# Altium PCB DIY Air Quality Monitor.PcbDoc
Units mm, origin at the board's own origin, x right, y up, seen from the top; angles counter-clockwise.
Board outline 85 x 65 mm, 2 copper layers (Top Layer, Bottom Layer); 23 components, 23 nets, 111 pads, 4 vias.
Unrouted connection lines stored in the file: 1.
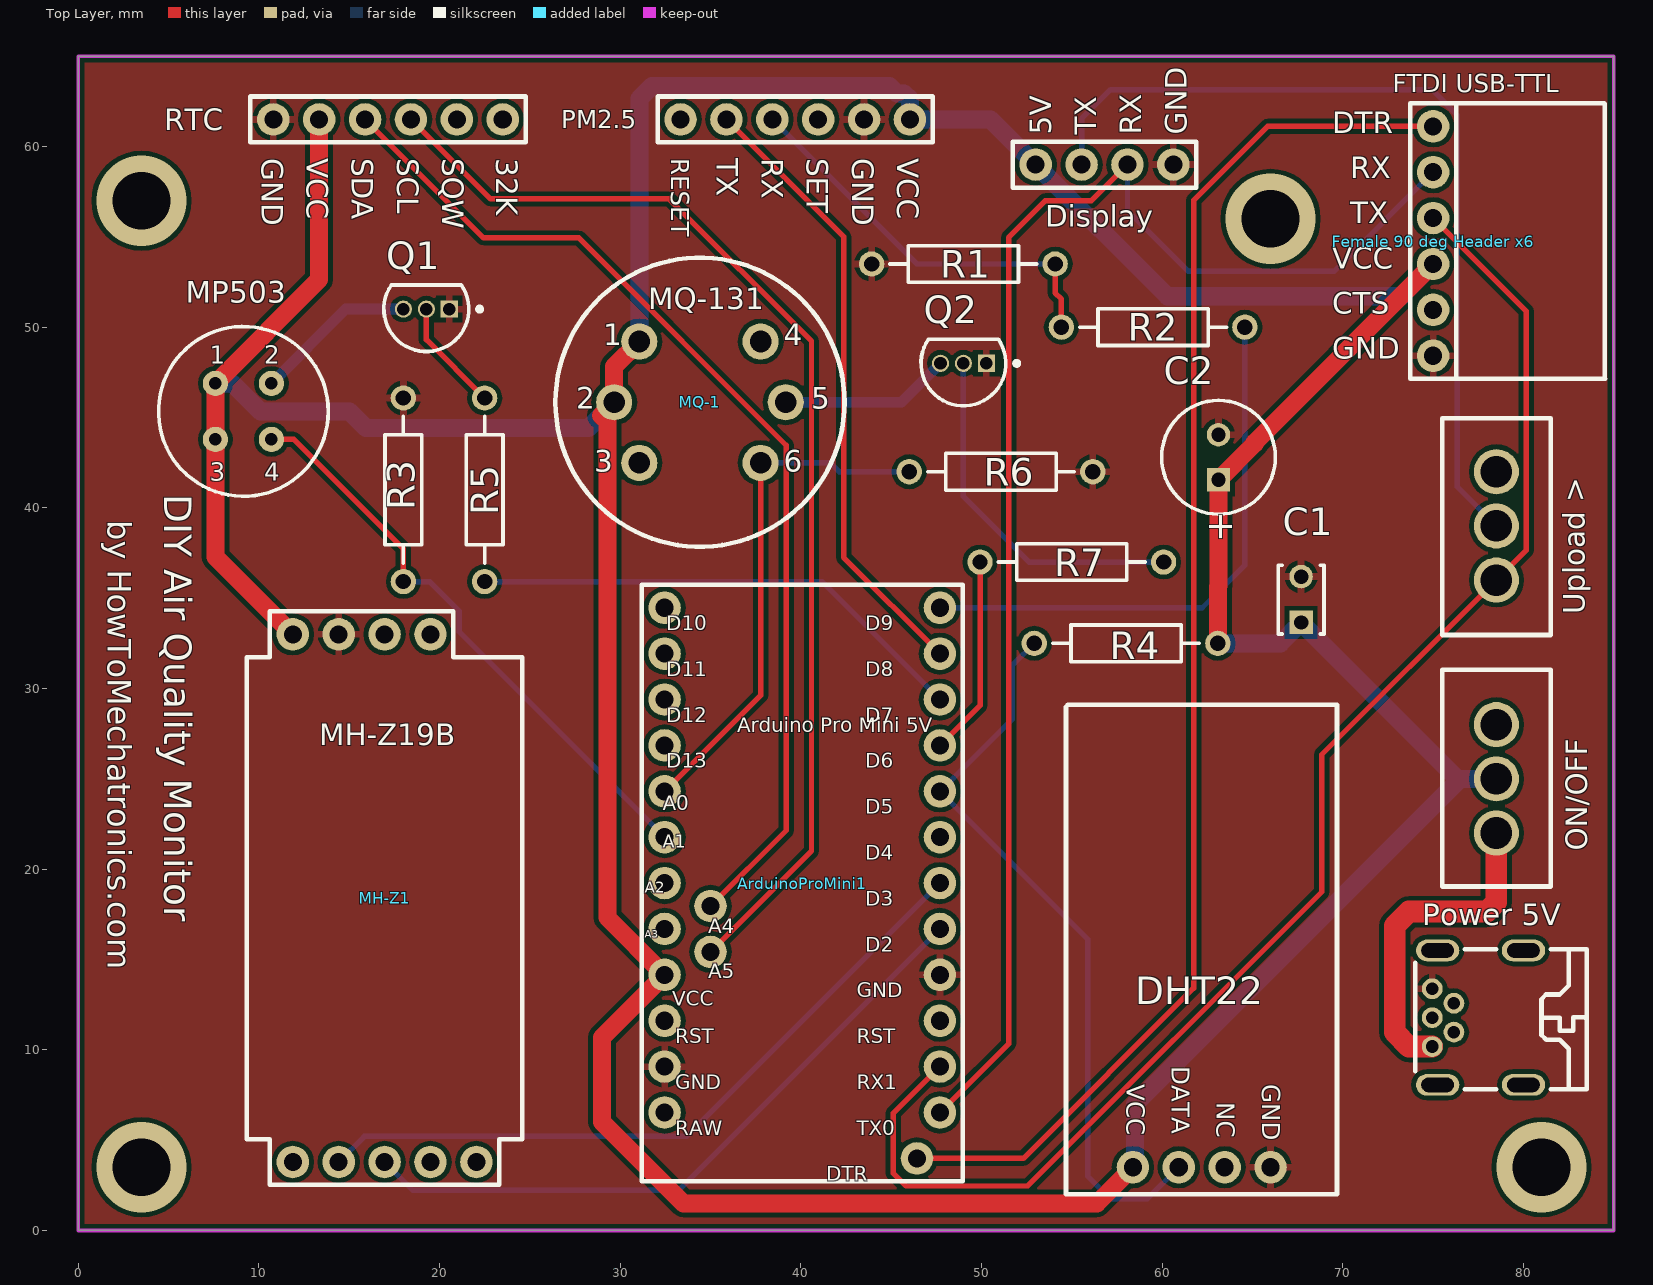
[diagram p0: Top Layer view]
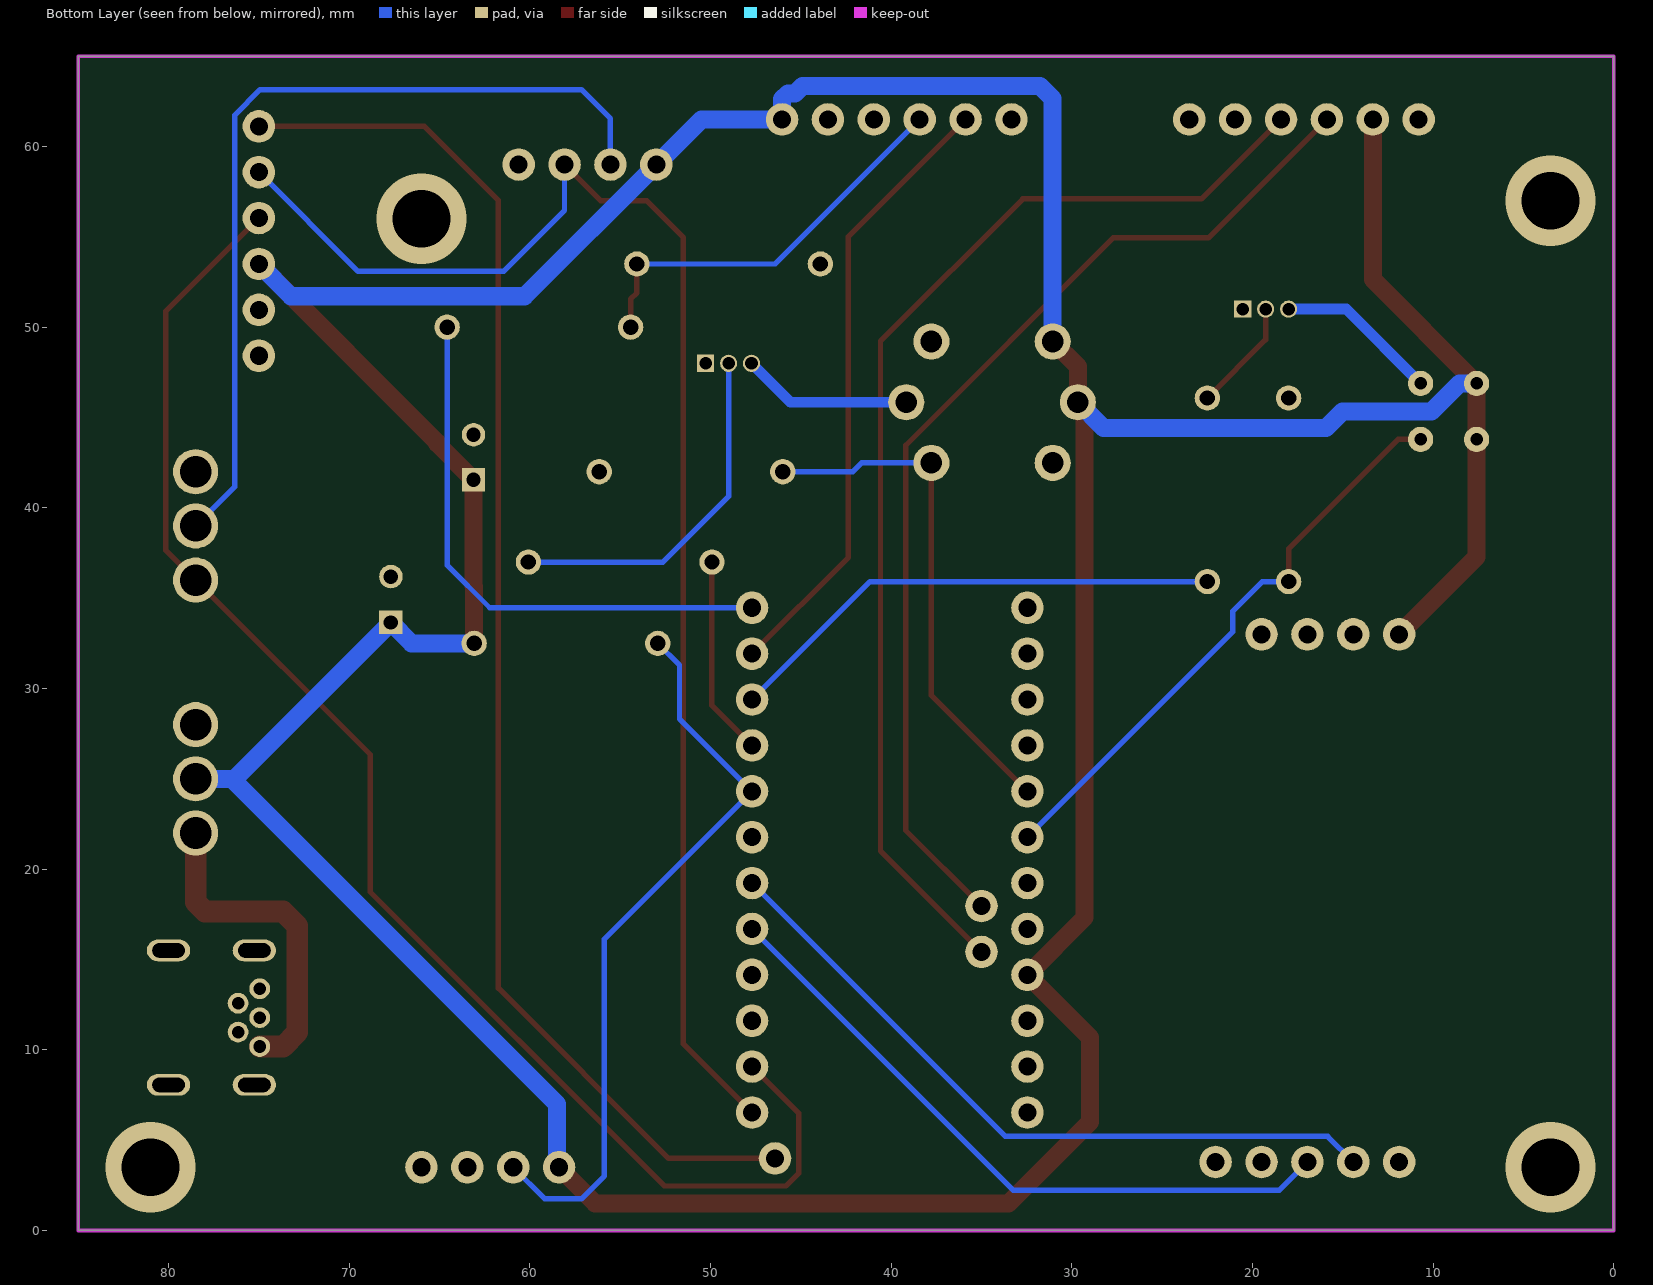
[diagram p1: Bottom Layer view, seen from below]
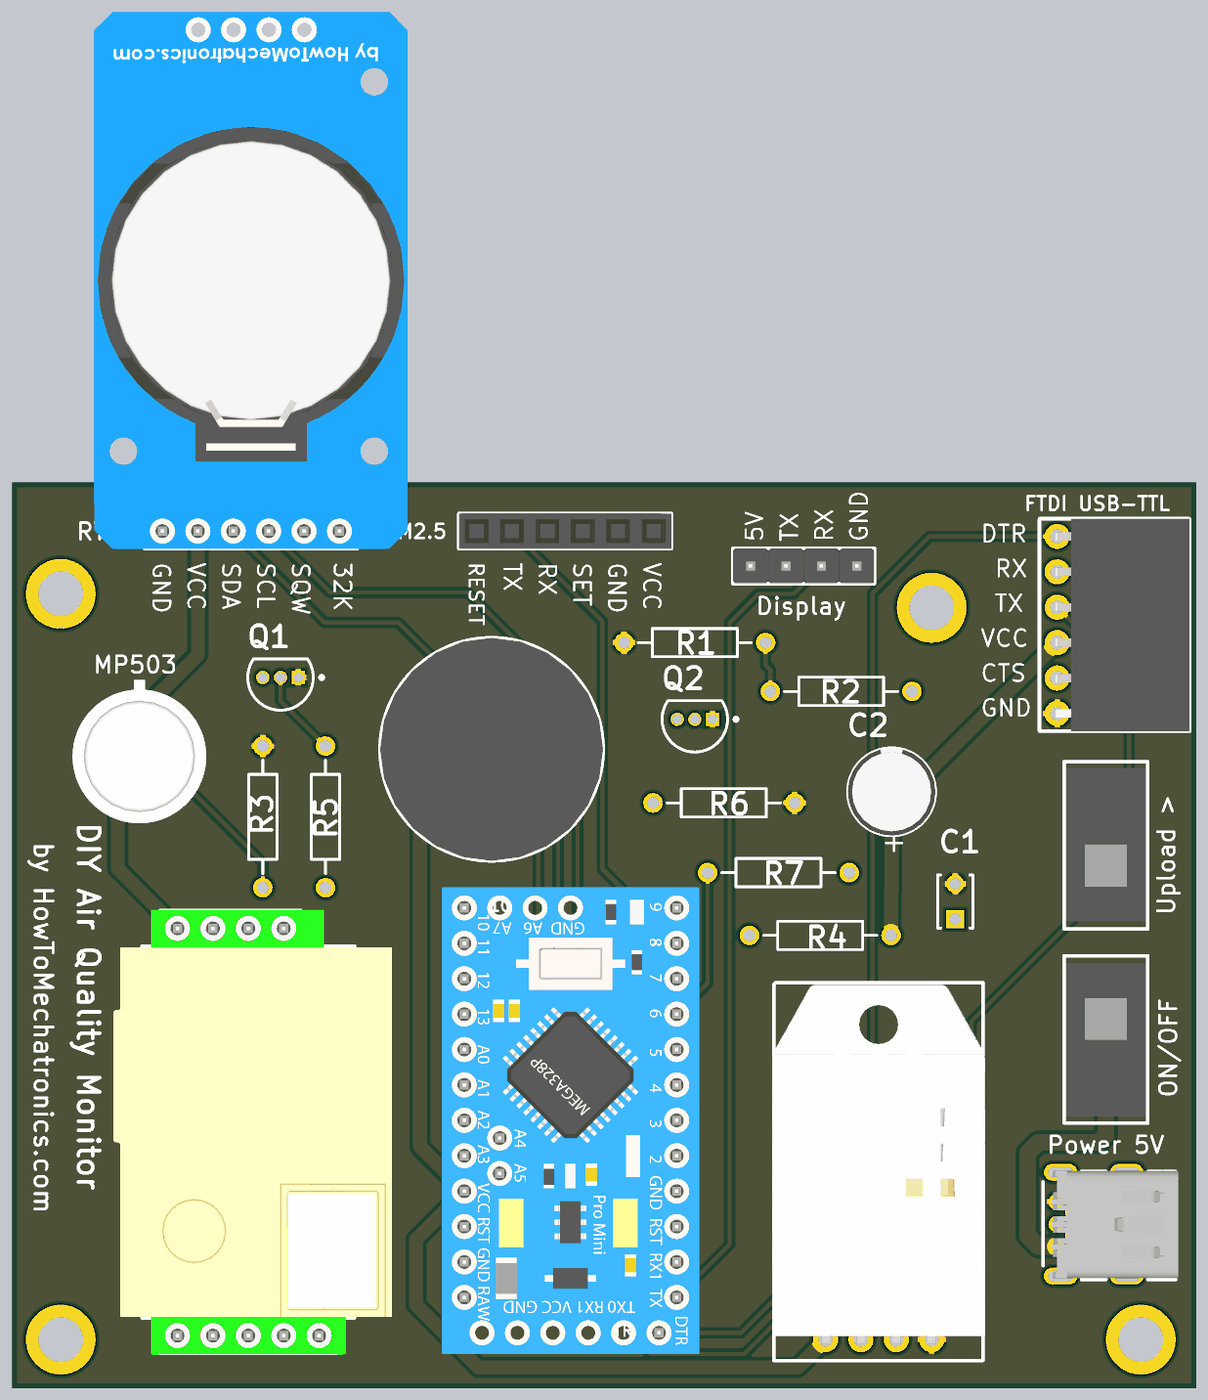
[diagram p2: 3D render of the assembled board from above, using the file's embedded part models]

## Layer stack, top to bottom
Top Solder: solder mask 0.0102, Solder Resist, Dk 3.5
Top Layer: signal copper 0.0356
Dielectric 1: dielectric 0.32, FR-4, Dk 4.8
Bottom Layer: signal copper 0.0356
Bottom Solder: solder mask 0.0102, Solder Resist, Dk 3.5

## Board outline
0,0 85,0 85,65 0,65

## Design rules (kind name [scope] priority, off if disabled: settings)
Clearance [All] p1: gap=0.254 ignorepadtopadclearanceinfootprint=FALSE except(0: Arc-Hole Track-Hole SMDPad-Hole THPad-Hole Via-Hole Fill-Hole Poly-Hole Region-Hole Text-Hole)
PolygonConnect [All] p1: connectstyle=Relief reliefconductorwidth=0.4 reliefentries=4 polygonreliefangle="90 Angle" airgapwidth=0.254
RoutingVias [All] p1: holewidth=0.711 width=1.27 viastyle="Through Hole" minholewidth=0.711 minwidth=1.27 maxholewidth=0.711 maxwidth=1.27
SolderMaskExpansion [All] p1: expansion=0.102 istentingtop=FALSE
Width Width_1 [InNet('+5')] p1: maxlimit=1 minlimit=0.3 preferedwidth=1
Width [All] p2: maxlimit=0.4 minlimit=0.3 preferedwidth=0.3
30 further rules are at their usual default settings.

## Components (designator, comment, footprint, x,y, rotation, side; value= is the part's Value field where it differs from the comment)
ArduinoProMini1 "5V Board" ARDUINO_PRO_MINI 32.46,34.47 r0 top
C1 "100pF" KEMT-C315-THT-2 67.691,34.925 r90 top
C2 "10uF" CAPPR55-250-1120X630X1220 63.119,42.799 r90 top
DHT22 "DHT22" DHT22 58.38,3.5 r0 top
Display "Pin Header x4 - Display" "Pin Header x4 - Display" 53,59 r90 top (schematic designator "Pin Header x4 - Display")
"Female 90 deg Header x6" "FTDI USB-TTL" "FEMALE 90 DEG HEADER X6" 75,54.77 r180 top
MH-Z1 "MH-Z19B CO2 Sensor" "MH-Z19B CO2 SENSOR" 11.88,3.79 r0 top
MP503 "MP503 VOC Sensor" "MP503 VOC SENSOR" 9.144,45.339 r0 top (schematic designator MP1)
MQ-1 "MQ-131 Ozone Sensor" "MQ-131 OZONE SENSOR" 34.417,45.847 r0 top
ON/OFF "Switch" Switch 78.5,25 r180 top (schematic designator Switch1)
PM2.5 "PMS5003 PM2.5 Sensor" "PMS5003 PM2.5 Sensor" 39.69,61.5 r270 top (schematic designator PMS1)
"Power 5V" "Mini USB TH" "MINI USB TH" 80,8.06 r90 top (schematic designator "Mini USB TH")
Q1 "2N3904" ONSC-TO-92-3-29-11 19.27,51 r180 top
Q2 "2N3904" ONSC-TO-92-3-29-11 49,48 r180 top
R1 "Res2" AXIAL-0.4 49,53.5 r0 top value=1K
R2 "Res2" AXIAL-0.4 59.5,50 r0 top value=1K
R3 "Res2" AXIAL-0.4 18,41 r90 top value=1K
R4 "Res2" AXIAL-0.4 58,32.5 r0 top value=1K
R5 "Res2" AXIAL-0.4 22.5,41 r90 top value=1K
R6 "Res2" AXIAL-0.4 51.08,42 r0 top value=1K
R7 "Res2" AXIAL-0.4 55,37 r0 top value=1K
RTC "DS3231 RTC" "DS3231 RTC" 10.8,61.5 r270 top (schematic designator DS1)
"Upload >" "Switch" Switch 78.5,39 r0 top (schematic designator Switch2)

## Footprints (in the part's own frame and the unit in brackets; to place one, negate y for a bottom-side part, rotate by r counter-clockwise, add the part's x,y. Pads: shape width x height; smd on the part's side, far side on the other; paste and mask are expansions set on the pad)
ARDUINO_PRO_MINI [mm] "5V Board"
  round 1.8 hole 1: A0(0,-10.16) A1(0,-12.7) A2(0,-15.24) A3(0,-17.78) A4/SDA(2.54,-16.51) A5/SCL(2.54,-19.05) D2(15.24,-17.78) D3(15.24,-15.24) D4(15.24,-12.7) D5(15.24,-10.16) D6(15.24,-7.62) D7(15.24,-5.08) D8(15.24,-2.54) D9(15.24,0) D10(0,0) D11(0,-2.54) D12(0,-5.08) D13(0,-7.62) DTR(13.97,-30.48) GND(0,-25.4) GND(15.24,-20.32) RAW(0,-27.94) RST(0,-22.86) RST(15.24,-22.86) RX1(15.24,-25.4) TX0(15.24,-27.94) VCC(0,-20.32)
  silkscreen extent -1.27,-31.75 16.51,1.27, body extent -1.63,-32 16.87,1.5, height 6.61
AXIAL-0.4 [mm] "Axial Device, Thru-Hole; 2 Leads; 0.4 in Pin Spacing"
  round 1.4 hole 0.85: 1(-5.08,0) 2(5.08,0)
  silkscreen extent -4.06,-1.02 4.06,1.02
CAPPR55-250-1120X630X1220 [mm] "THD, 2-Leads, Dia 6.3mm, Body Length 11.2mm"
  rect 1.3x1.3 hole 0.8: 1(-1.25,0)
  round 1.3 hole 0.8: 2(1.25,0)
  silkscreen extent -3.15,-3.15 3.15,3.15, body extent -3.15,-3.15 3.16,3.15, height 12.21
DHT22 [mm]
  round 1.8 hole 1: DATA(2.54,0) GND(7.62,0) NC(5.08,0) VCC(0,0)
  silkscreen extent -3.7,-1.5 11.3,25.6, body extent -3.84,-0.3 11.46,25.45, height 7.8
"DS3231 RTC" [mm] "DS3231 RTC"
  round 1.8 hole 1: 32K(0,12.7) GND(0,0) SCL(0,7.62) SDA(0,5.08) SQW(0,10.16) VCC(0,2.54)
  silkscreen extent -1.27,-1.27 1.27,13.97, body extent -37.23,-4.9 1.27,17.6, height 13.41
"FEMALE 90 DEG HEADER X6" [mm] "Female 90 deg Header x6"
  round 1.8 hole 1: CTS(0,3.81) DTR(0,-6.35) GND(0,6.35) RX(0,-3.81) TX(0,-1.27) VCC(0,1.27)
  silkscreen extent -9.52,-7.62 1.27,7.62, body extent -9.5,-7.62 0.2,7.62, height 2.52
KEMT-C315-THT-2 [mm] "THD, 2-Leads, Body 3.81x2.54mm"
  rect 1.3x1.3 hole 0.8: 1(-1.27,0)
  round 1.3 hole 0.8: 2(1.27,0)
  silkscreen extent -1.91,-1.27 1.91,1.27, body extent -1.91,-1.27 1.91,1.27, height 4.66
"MH-Z19B CO2 SENSOR" [mm]
  round 1.8 hole 1: GND(2.54,29.21) HD(10.16,0) NC(5.08,29.21) NC(7.62,0) PWM(7.62,29.21) RX(2.54,0) TX(5.08,0) Vin(0,29.21) Vo(0,0)
  silkscreen extent -2.54,-1.27 12.7,30.48, body extent -4.6,-1.35 15.4,30.55, height 11.31
"MINI USB TH" [mm]
  round 1.15 hole 0.7: 5V(2.12,5.05) D+(3.72,5.05) D-(2.92,3.85) GND(5.32,5.05) ID(4.52,3.85)
  oval 1.2x2.4 hole 0.8 slot 1.8 at 90 deg: N(0,4.75) N(0,0) N(7.44,0) N(7.44,4.75)
  silkscreen extent -0.25,-3.5 7.5,6, body extent -0.15,-3.7 7.55,5.3, height 3.95
"MP503 VOC SENSOR" [mm]
  round 1.4 hole 0.7: 1(-1.55,1.55) 2(1.55,1.55) 3(-1.55,-1.55) 4(1.55,-1.55)
  silkscreen extent -4.7,-4.7 4.7,4.7, body extent -4.7,-4.7 4.7,5.5, height 8.1
"MQ-131 OZONE SENSOR" [mm]
  round 2 hole 1.2: 1(-3.359,3.359) 2(-4.75,0) 3(-3.359,-3.359) 4(3.359,3.359) 5(4.75,0) 6(3.359,-3.359)
  silkscreen extent -8,-8 8,8, body extent -8,-8 8,8, height 14
ONSC-TO-92-3-29-11 [mm] "TO, 3-Leads, Body Dia 4.7mm, Pitch 1.27mm"
  rect 0.95x0.95 hole 0.7: 1(-1.27,0)
  round 0.95 hole 0.7: 2(0,0) 3(1.27,0)
  silkscreen extent -3.08,-1.34 2.35,2.35, body extent -2.35,-1.33 2.36,2.36, height 7.87
"Pin Header x4 - Display" [mm] "Pin Header x4 - Display"
  round 1.8 hole 1: 5V(0,0) GND(0,-7.62) RX(0,-5.08) TX(0,-2.54)
  silkscreen extent -1.27,-8.89 1.27,1.27, body extent -1.25,-8.87 1.25,1.25, height 8.2
"PMS5003 PM2.5 Sensor" [mm] "PMS5003 PM2.5 Sensor"
  round 1.8 hole 1: GND(0,3.81) RESET(0,-6.35) RX(0,-1.27) SET(0,1.27) TX(0,-3.81) VCC(0,6.35)
  silkscreen extent -1.27,-7.62 1.27,7.62, body extent -1.27,-7.62 1.27,7.62, height 8.5
Switch [mm]
  round 2.5 hole 1.75: 1(0,3) 2(0,0) 3(0,-3)
  silkscreen extent -3,-6.04 3,5.96, body extent -2.85,-5.5 2.85,5.5, height 10.5

## Part data
ArduinoProMini1: library part "Arduino Pro Mini Board"
C1: library part CMP-1664-00010-1, "Capacitor, Ceramic, 1000 pF, +/-10 %, 100 V, X7R, -55 to 125 degC, 2-Pin THD, RoHS, Bulk", Case\Package=DFN, Max Operating Temperature="125 degC", Max Supply Voltage="3.6 V", Min Operating Temperature="-40 degC", Min Supply Voltage="1.5 V", Nominal Supply Voltage="3 V", ComponentLink1Description="Manufacturer URL", ComponentLink1URL=http://www.kemet.com/, ComponentLink2Description=Datasheet, ComponentLink2URL=http://capacitoredge.kemet.com/capedge2/DataSheet/Datasheet-C315C102K1R5TA.pdf?pn=C315C102K1R5TA{BULK}, DatasheetVersion=Aug-16, Interface=Serial, Mount="Surface Mount", PackageDescription="2-Pin Through Hole Device, Body 3.81 x 2.54 mm", PackageReference=C315-THT-2, Packaging="Tape and Reel", Pins=6, Radiation Hardening=No, REACH SVHC=Unknown, RoHSCompliant=true
C2: library part CMP-1665-00035-2, "Aluminum Electrolytic Capacitor, 22 uF, +/- 20%, 100 V, -40 to 85 degC, 2-Pin THD, RoHS, Bulk", Case Code (Imperial)=0603, Case Code (Metric)=1608, Colour=Orange, Forward Current="20 mA", Forward Voltage="2.1 V", Max Operating Temperature="85 degC", Min Operating Temperature="-55 degC", Package Quantity=3000, Case\Package=0603, ComponentLink1Description="Manufacturer URL", ComponentLink1URL=http://www.panasonic.com/, ComponentLink2Description=Datasheet, ComponentLink2URL=https://industrial.panasonic.com/cdbs/www-data/pdf/RDF0000/ABA0000C1047.pdf, DatasheetVersion=Mar-16, Height="1.1 mm", Illumination Colour=Orange, Length="1.6 mm", Lens Style=Clear, Luminous Intensity="2 mcd", Mount="Surface Mount", Nominal Vf="2.1 V", PackageDescription="2-Pin Through Hole Device, Dia 6.3 mm, Body Length 11.2 mm", PackageReference=Radial, Packaging="Tape and Reel", Pins=2, Radiation Hardening=No, RoHSCompliant=true, Viewing Angle="130 degrees", Width="0.8 mm"
"Female 90 deg Header x6": library part "Female 90 deg Header x6"
Q1 Q2: library part CMP-2000-05562-1, "General Purpose Transistor, NPN Silicon, 200 mA, 60 V, -55 to 150 degC, 3-Pin TO-92, RoHS, Bulk", Collector- Base Voltage VCBO=60V, Collector- Emitter Voltage VCEO Max=40V, Collector-Emitter Saturation Voltage=0.3V, Emitter- Base Voltage VEBO=6V, Manufacturer=ONSemiconductor, Maximum DC Collector Current=0.2A, Maximum Operating Temperature=+150C, Maximum Power Dissipation=625mW, Minimum Operating Temperature=-65C, Package / Case=TO-92-3(TO-226), Package Description="3-Pin Transistor Outline, Body 4.825 x 3.685 mm, Pitch 1.27 mm", Package Reference=TO-92-3-29-11, Brand=ONSemiconductor, Configuration=Single, Datasheet URL=https://datasheet.ciiva.com/4725/2n3903-d-285841-4725808.pdf, Datasheet Version="Rev. 8, 08/2012", DC Collector/Base Gain hfe Min=60, Factory Pack Quantity=5000, Gain Bandwidth Product fT=270MHz, Manufacturer URL=http://www.onsemi.com/, Mounting Style=ThroughHole, Mounting Technology=ThroughHole, Packaging=Bulk, Product Category=BipolarTransistors-BJT, RoHS=Details, Transistor Polarity=NPN
R1 R2 R3 R4 R5 R6 R7: "Resistor", LatestRevisionDate=17-Jul-2002, LatestRevisionNote="Re-released for DXP Platform.", PackageDescription="Axial Device, Thru-Hole; 2 Leads; 0.4 in Pin Spacing", PackageReference=AXIAL-0.4, Published=8-Jun-2000, Publisher="Altium Limited"

## Via types
v1: diameter 5, hole 3.2, Top Layer to Bottom Layer, 4 vias

## Nets (pads, with @x,y where several pads share a name; then routed paths per layer and width w, separated by ;. In a path a pad name is that pad's centre, name@x,y a point inside that pad or via, vN(x,y) a via of type N, cw(c..) or ccw(c..) an arc to the next point about the centre after c; other vN are vias at no path point)
+5: "Female 90 deg Header x6.VCC" "Power 5V.5V" ArduinoProMini1.VCC C1.1 C2.1 DHT22.VCC Display.5V MH-Z1.Vin MP503.1 MP503.3 MQ-1.1 MQ-1.2 ON/OFF.1 ON/OFF.2 PM2.5.VCC R4.2 RTC.VCC | length 292
  Top Layer w1: MH-Z1.Vin 7.594,37.286 MP503.3 MP503.1 13.34,52.635 RTC.VCC ; MQ-1.1 29.667,47.814 MQ-1.2 28.943,45.123 29.286,44.78 29.286,17.324 ArduinoProMini1.VCC 29,10.69 29,6 33.5,1.5 56.38,1.5 DHT22.VCC ; R4.2 63.08,35.648 63.119,35.687 C2.1 65.126,43.556 65.126,43.626 75,53.5 ; ON/OFF.1 ON/OFF.1@78.511,22.011 ; ON/OFF.2 ON/OFF.2@78.511,24.989
  Top Layer w1.2: 74.95,10.18 73.66,10.18 72.873,10.967 72.873,16.866 73.66,17.653 77.978,17.653 78.5,18.175 ON/OFF.1
  Bottom Layer w1: MP503.1 8.534,46.889 10.084,45.339 15.011,45.339 15.926,44.425 28.245,44.425 MQ-1.2 ; MQ-1.1 31.058,62.656 31.75,63.348 44.907,63.348 45.314,62.941 45.72,62.941 46.04,62.621 PM2.5.VCC 50.5,61.5 Display.5V 60.286,51.714 73.214,51.714 75,53.5 ; DHT22.VCC 58.5,3.62 58.5,7 76.346,24.846 76.346,25 ; R4.2 66.536,32.5 C1.1 76.346,25 ; ON/OFF.2 76.346,25
GND: "Female 90 deg Header x6.GND" "Power 5V.GND" ArduinoProMini1.GND C1.2 C2.2 DHT22.GND Display.GND MH-Z1.GND PM2.5.GND Q1.1 Q2.1 R1.1 R3.2 R6.2 RTC.GND
NetArduinoProMini1_A0: ArduinoProMini1.A0 MQ-1.6 R6.1 | length 28.8
  Top Layer w0.3: ArduinoProMini1.A0 37.776,29.626 MQ-1.6
  Bottom Layer w0.3: MQ-1.6 41.631,42.488 42.119,42 R6.1
NetArduinoProMini1_A1: ArduinoProMini1.A1 MP503.4 R3.1 | length 32.6
  Top Layer w0.3: MP503.4 11.939,43.789 18,37.728 R3.1
  Bottom Layer w0.3: R3.1 19.452,35.92 21.082,34.29 21.082,33.148 ArduinoProMini1.A1
NetArduinoProMini1_A4/SDA: ArduinoProMini1.A4/SDA RTC.SDA | length 58
  Top Layer w0.3: RTC.SDA 22.44,54.94 27.711,54.94 39.192,43.459 39.192,22.152 ArduinoProMini1.A4/SDA
NetArduinoProMini1_A5/SCL: ArduinoProMini1.A5/SCL RTC.SCL | length 63.4
  Top Layer w0.3: RTC.SCL 22.821,57.099 32.715,57.099 40.589,49.225 40.589,21.009 ArduinoProMini1.A5/SCL
NetArduinoProMini1_D2: ArduinoProMini1.D2 MH-Z1.TX | length 37.4
  Bottom Layer w0.3: MH-Z1.TX 18.515,2.235 33.245,2.235 ArduinoProMini1.D2
NetArduinoProMini1_D3: ArduinoProMini1.D3 MH-Z1.RX | length 39.7
  Bottom Layer w0.3: MH-Z1.RX 15.837,5.207 33.677,5.207 ArduinoProMini1.D3
NetArduinoProMini1_D5: ArduinoProMini1.D5 DHT22.DATA R4.1 | length 41.3
  Bottom Layer w0.3: R4.1 51.714,31.294 51.714,28.324 ArduinoProMini1.D5 55.88,16.13 55.88,3.023 57.15,1.753 59.173,1.753 DHT22.DATA
NetArduinoProMini1_D6: ArduinoProMini1.D6 R7.1 | length 11.1
  Top Layer w0.3: ArduinoProMini1.D6 49.92,29.07 R7.1
NetArduinoProMini1_D7: ArduinoProMini1.D7 R5.1 | length 27.9
  Bottom Layer w0.3: R5.1 41.17,35.92 ArduinoProMini1.D7
NetArduinoProMini1_D8: ArduinoProMini1.D8 PM2.5.TX | length 34.5
  Top Layer w0.3: PM2.5.TX 42.367,55.013 42.367,37.263 ArduinoProMini1.D8
NetArduinoProMini1_D9: ArduinoProMini1.D9 R2.2 | length 31
  Bottom Layer w0.3: ArduinoProMini1.D9 62.22,34.47 64.58,36.83 R2.2
NetArduinoProMini1_DTR: "Female 90 deg Header x6.DTR" ArduinoProMini1.DTR | length 77.8
  Top Layer w0.3: ArduinoProMini1.DTR 52.326,3.99 61.747,13.411 61.747,57.023 65.844,61.12 75,61.12
NetArduinoProMini1_RX1: "Female 90 deg Header x6.TX" "Upload >.3" ArduinoProMini1.RX1 | length 81.9
  Top Layer w0.3: ArduinoProMini1.RX1 45.11,6.48 45.11,3.175 45.822,2.464 52.553,2.464 68.834,18.745 68.834,26.334 78.5,36 80.162,37.662 80.162,50.878 75,56.04
NetArduinoProMini1_TX0: "Female 90 deg Header x6.RX" ArduinoProMini1.TX0 Display.RX | length 81.4
  Top Layer w0.3: ArduinoProMini1.TX0 51.5,10.33 51.5,54.96 53.54,57 56.08,57 Display.RX
  Bottom Layer w0.3: Display.RX 58.08,56.46 61.454,53.086 69.506,53.086 75,58.58
NetArduinoProMini1_VCC: 
NetMP1_2: MP503.2 Q1.3 | length 9
  Bottom Layer w0.6: MP503.2 14.805,51 Q1.3
NetMQ-1_5: MQ-1.5 Q2.3 | length 9.5
  Bottom Layer w0.6: MQ-1.5 45.577,45.847 Q2.3
"NetPin Header x4 - Display_TX": "Upload >.2" Display.TX | length 48.2
  Bottom Layer w0.3: Display.TX 55.54,61.54 57.144,63.144 74.93,63.144 76.327,61.747 76.327,41.173 78.5,39
NetPMS1_RX: PM2.5.RX R1.2 R2.1 | length 22.6
  Top Layer w0.3: R1.2 54.08,51.902 54.42,51.562 R2.1
  Bottom Layer w0.3: PM2.5.RX 46.42,53.5 R1.2
NetQ1_2: Q1.2 R5.2 | length 6.3
  Top Layer w0.3: Q1.2 19.27,49.31 R5.2
NetQ2_2: Q2.2 R7.2 | length 19.9
  Bottom Layer w0.3: Q2.2 49,40.64 52.64,37 R7.2
pads on no net: "Female 90 deg Header x6.CTS" "Power 5V.D+" "Power 5V.D-" "Power 5V.ID" "Power 5V.N" "Upload >.1" ArduinoProMini1.A2 ArduinoProMini1.A3 ArduinoProMini1.D4 ArduinoProMini1.D10 ArduinoProMini1.D11 ArduinoProMini1.D12 ArduinoProMini1.D13 ArduinoProMini1.RAW ArduinoProMini1.RST DHT22.NC MH-Z1.HD MH-Z1.NC MH-Z1.PWM MH-Z1.Vo MQ-1.3 MQ-1.4 ON/OFF.3 PM2.5.RESET PM2.5.SET RTC.32K RTC.SQW
copper on no net:
  other v1: 3.5,3.5 81,3.5 66,56 3.5,57

## Polygon pours and split planes (outlines as drawn)
GND on Top Layer "GND_L02_P-001" (solid, pour order 0): 0,65 85,65 85,0 0,0

## Keep-outs
Keep-Out Layer:
  the board outline again, w0.2

## Silkscreen, mask and mechanical layers (free items; w line width, h text height)
Top Overlay:
  text "DIY Air Quality Monitor" at 4.762,40.746 h1.52 r270
  text "by HowToMechatronics.com" at 1.633,39.3 h1.3 r270

## Text inside footprints (layer, text, board x,y; h text height)
ArduinoProMini1: Top Overlay "D13" at 32.555,25.6 h0.8; Top Overlay "VCC" at 32.888,12.45 h0.8; Top Overlay "TX0" at 43.088,5.28 h0.8; Top Overlay "D7" at 43.555,28.14 h0.8; Top Overlay "D6" at 43.555,25.6 h0.8; Top Overlay "A2" at 31.348,18.69 h0.6; Top Overlay "A1" at 32.348,21.19 h0.7; Top Overlay "RX1" at 43.088,7.82 h0.8; Top Overlay "A5" at 34.888,13.95 h0.8; Top Overlay "D11" at 32.555,30.68 h0.8; Top Overlay "RST" at 43.088,10.36 h0.8; Top Overlay "D5" at 43.555,23.06 h0.8; Top Overlay "A3" at 31.348,16.19 h0.4; Top Overlay "D2" at 43.555,15.44 h0.8; Top Overlay "A4" at 34.888,16.45 h0.8; Top Overlay "Arduino Pro Mini 5V" at 36.488,27.583 h0.8; Top Overlay "D3" at 43.555,17.98 h0.8; Top Overlay "GND" at 43.088,12.9 h0.8; Top Overlay "GND" at 33.055,7.82 h0.8; Top Overlay "DTR" at 41.395,2.74 h0.8; Top Overlay "A0" at 32.348,23.27 h0.8; Top Overlay "D4" at 43.555,20.52 h0.8; Top Overlay "RAW" at 33.055,5.28 h0.8; Top Overlay "RST" at 33.055,10.36 h0.8; Top Overlay "D9" at 43.555,33.22 h0.8; Top Overlay "D12" at 32.555,28.14 h0.8; Top Overlay "D8" at 43.555,30.68 h0.8; Top Overlay "D10" at 32.555,33.22 h0.8
C2: Top Overlay "+" at 63.869,38.099 h1.5 r90
DHT22: Top Overlay "NC" at 63.03,7.1 h1 r270; Top Overlay "GND" at 65.53,8.1 h1 r270; Top Overlay "DATA" at 60.53,9.1 h1 r270; Top Overlay "VCC" at 58.03,8.1 h1 r270
Display: Top Overlay "GND" at 61.35,60.65 h1.2 r90; Top Overlay "RX" at 58.85,60.65 h1.2 r90; Top Overlay "TX" at 56.35,60.65 h1.2 r90; Top Overlay "5V" at 53.85,60.65 h1.2 r90
"Female 90 deg Header x6": Top Overlay "GND" at 69.42,48.247 h1.2; Top Overlay "CTS" at 69.42,50.747 h1.2; Top Overlay "VCC" at 69.42,53.247 h1.2; Top Overlay "TX" at 70.42,55.747 h1.2; Top Overlay "RX" at 70.42,58.247 h1.2; Top Overlay "DTR" at 69.42,60.747 h1.2
MH-Z1: Top Overlay "MH-Z19B" at 13.35,26.85 h1.2
MP503: Top Overlay "4" at 10.294,41.489 h1; Top Overlay "3" at 7.294,41.489 h1; Top Overlay "1" at 7.294,47.989 h1; Top Overlay "2" at 10.294,47.989 h1
MQ-1: Top Overlay "4" at 39.067,48.997 h1.2; Top Overlay "5" at 40.567,45.497 h1.2; Top Overlay "6" at 39.067,41.997 h1.2; Top Overlay "3" at 28.567,41.997 h1.2; Top Overlay "2" at 27.567,45.497 h1.2; Top Overlay "1" at 29.067,48.997 h1.2; Top Overlay "MQ-131" at 31.567,50.997 h1.2
PM2.5: Top Overlay "VCC" at 45.34,59.35 h1.2 r270; Top Overlay "GND" at 42.84,59.35 h1.2 r270; Top Overlay "SET" at 40.34,59.35 h1.2 r270; Top Overlay "RX" at 37.84,59.35 h1.2 r270; Top Overlay "TX" at 35.34,59.35 h1.2 r270; Top Overlay "RESET" at 32.84,59.35 h1 r270
RTC: Top Overlay "GND" at 10.15,59.35 h1.2 r270; Top Overlay "VCC" at 12.65,59.35 h1.2 r270; Top Overlay "SDA" at 15.15,59.35 h1.2 r270; Top Overlay "SCL" at 17.65,59.35 h1.2 r270; Top Overlay "SQW" at 20.15,59.35 h1.2 r270; Top Overlay "32K" at 23.15,59.35 h1.2 r270